# Altium PCB ADCS_Sensor_Simulator2.PcbDoc
Units mm, origin at the board's own origin, x right, y up, seen from the top; angles counter-clockwise.
Board outline 44.83 x 79.25 mm, 2 copper layers (Top Layer, Bottom Layer); 45 components, 36 nets, 211 pads, 55 vias.
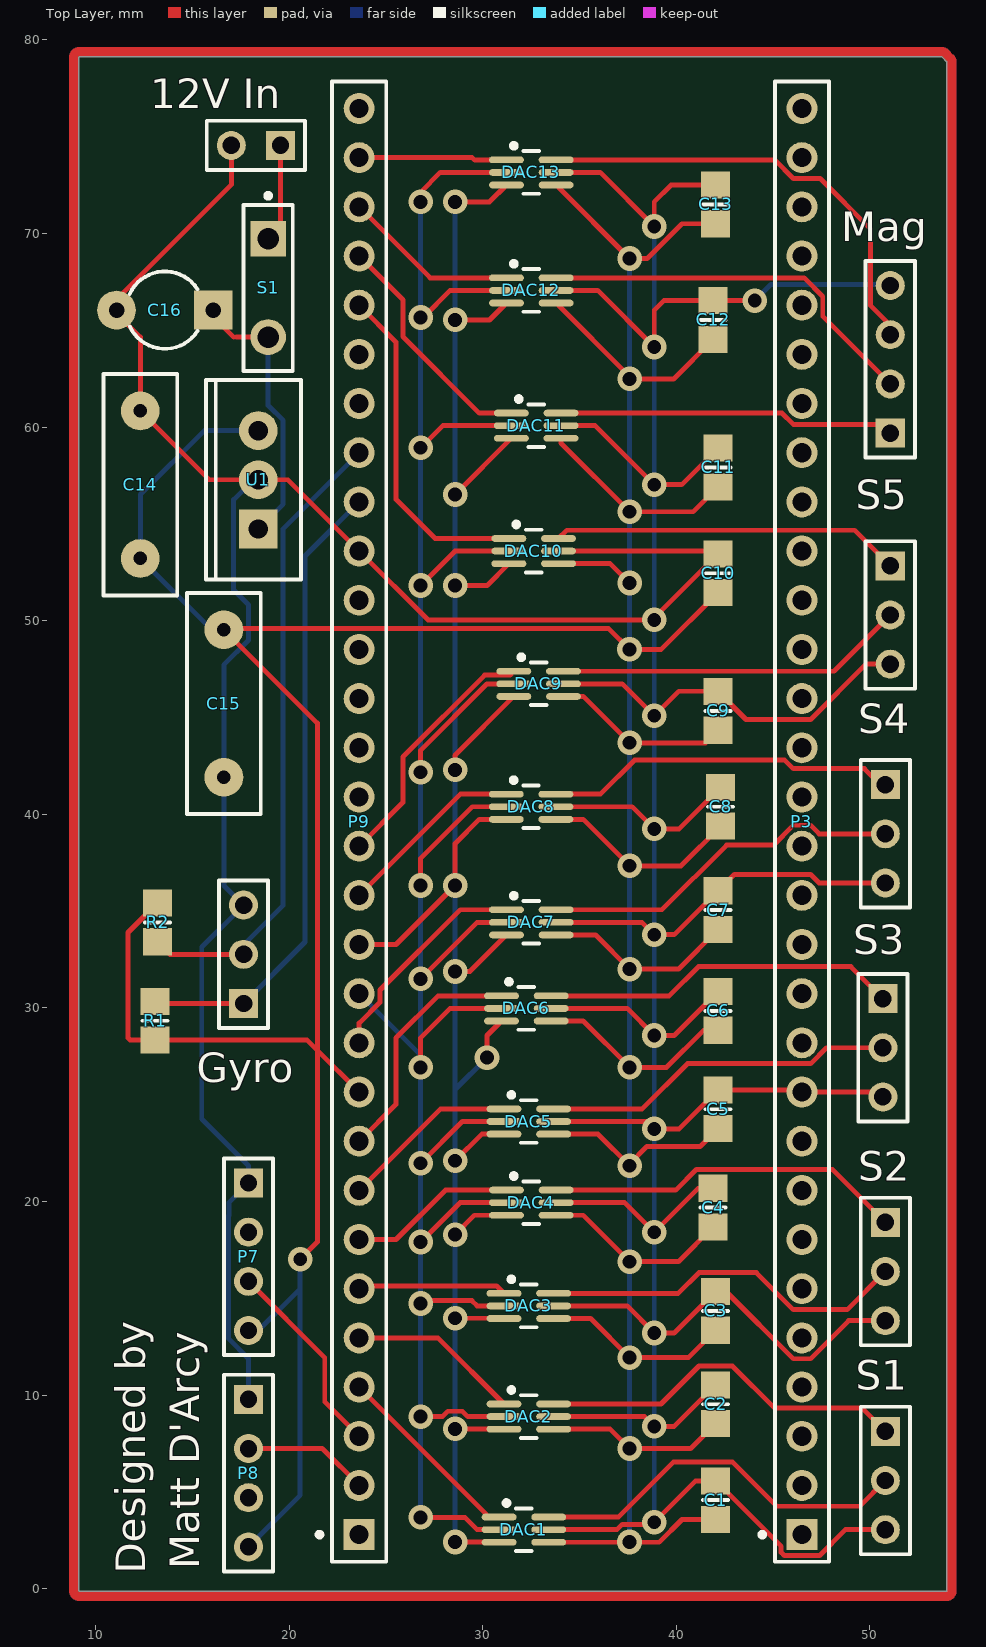
[diagram p0: Top Layer view]
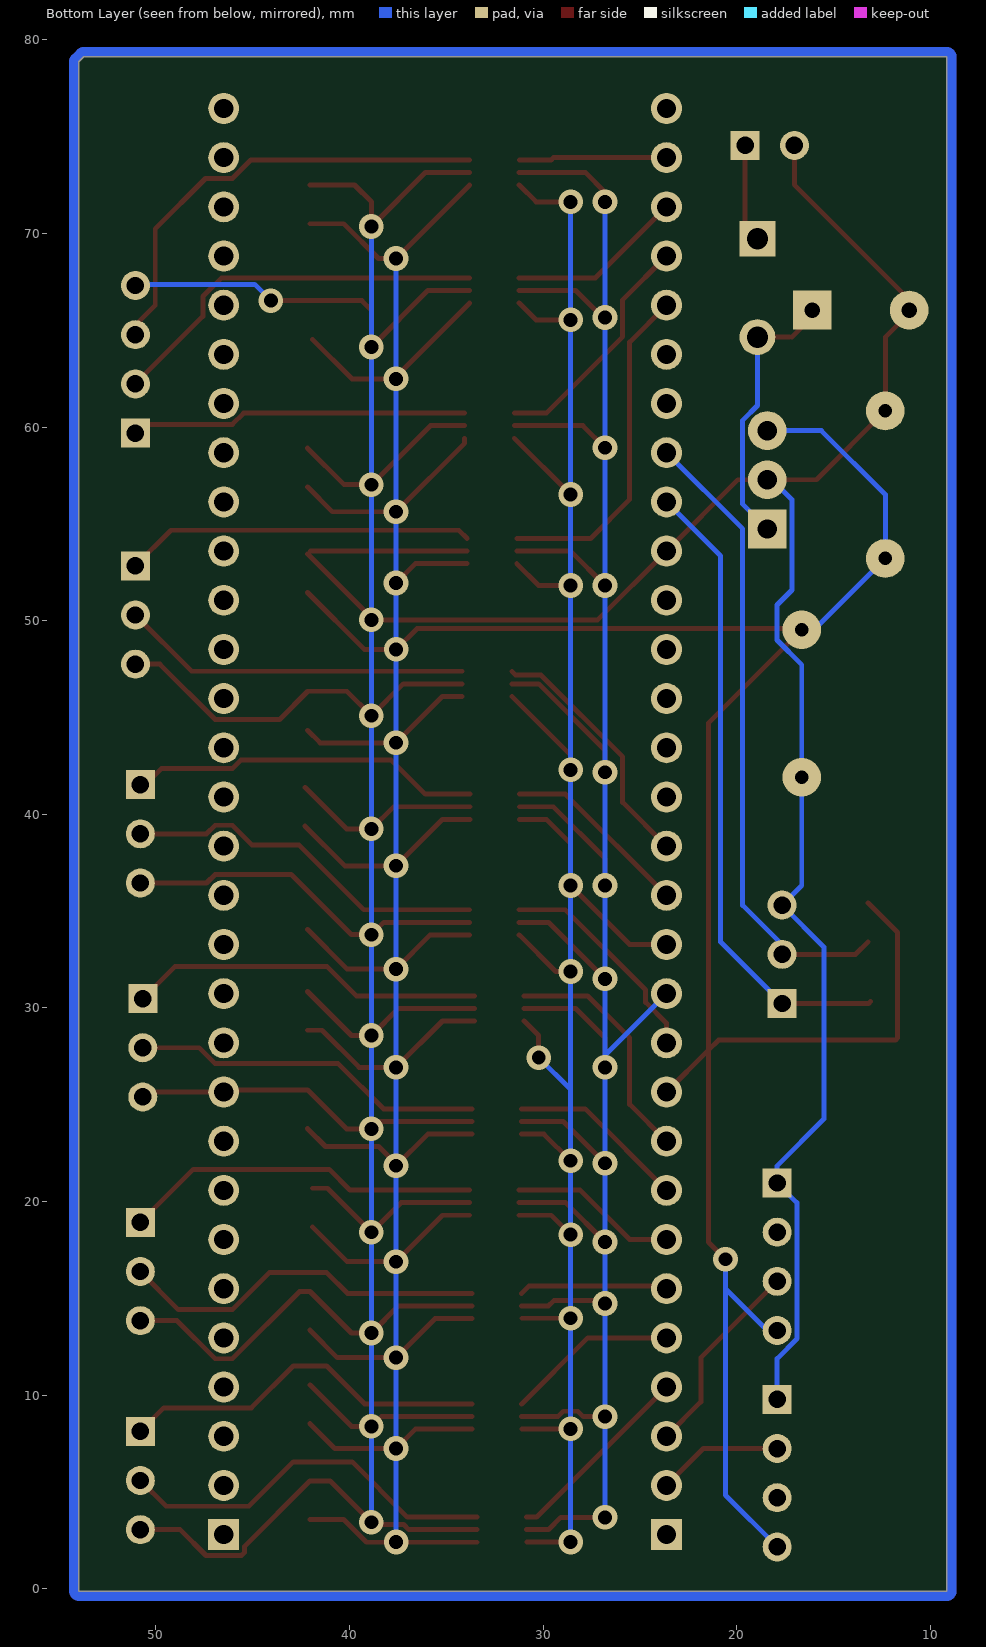
[diagram p1: Bottom Layer view, seen from below]

## Layer stack, top to bottom
Top Layer: signal copper 0.0356
Dielectric: dielectric 0.32, FR-4, Dk 4.8
Bottom Layer: signal copper 0.0356

## Board outline
9.144,78.994 9.144,-0.127 53.975,-0.127 53.975,78.867 53.721,79.121 9.144,79.121

## Design rules (kind name [scope] priority, off if disabled: settings)
Clearance [All] p1: gap=0.15
PolygonConnect [All] p1: connectstyle=Relief reliefconductorwidth=0.254 reliefentries=4 polygonreliefangle="90 Angle" airgapwidth=0.254
RoutingVias [All] p1: holewidth=0.711 width=1.27 viastyle="Through Hole" minholewidth=0.711 minwidth=1.27 maxholewidth=0.711 maxwidth=1.27
SolderMaskExpansion [All] p1: expansion=0.102
Width [All] p1: maxlimit=0.254 minlimit=0.254 preferedwidth=0.254
28 further rules are at their usual default settings.

## Components (designator, comment, footprint, x,y, rotation, side; value= is the part's Value field where it differs from the comment)
"12V In" "12V In" HDR1X2 19.558,74.549 r180 top (schematic designator P12)
C1 "Regulator" 6-0805_M 42.037,4.572 r90 top
C2 "Regulator" 6-0805_M 42.037,9.525 r90 top
C3 "Regulator" 6-0805_M 42.037,14.351 r90 top
C4 "Regulator" 6-0805_M 41.91,19.685 r90 top
C5 "Regulator" 6-0805_M 42.164,24.765 r90 top
C6 "Regulator" 6-0805_M 42.164,29.845 r90 top
C7 "Regulator" 6-0805_M 42.164,35.052 r90 top
C8 "Regulator" 6-0805_M 42.291,40.386 r90 top
C9 "Regulator" 6-0805_M 42.164,45.339 r90 top
C10 "Regulator" 6-0805_M 42.164,52.451 r90 top
C11 "Regulator" 6-0805_M 42.164,57.912 r90 top
C12 "Regulator" 6-0805_M 41.91,65.532 r90 top
C13 "Regulator" 6-0805_M 42.037,71.501 r90 top
C14 "Regulator" RAD-0.3 12.319,57.023 r90 top
C15 "Regulator" RAD-0.3 16.637,45.72 r270 top
C16 "Bypass" CAPR5-4X5 13.589,66.04 r180 top
DAC1 "LTC2630" LTC2630 32.131,3.048 r0 top
DAC2 "LTC2630" LTC2630 32.385,8.89 r0 top
DAC3 "LTC2630" LTC2630 32.385,14.605 r0 top
DAC4 "LTC2630" LTC2630 32.512,19.939 r0 top
DAC5 "LTC2630" LTC2630 32.385,24.13 r0 top
DAC6 "LTC2630" LTC2630 32.258,29.972 r0 top
DAC7 "LTC2630" LTC2630 32.512,34.417 r0 top
DAC8 "LTC2630" LTC2630 32.501,40.386 r0 top
DAC9 "LTC2630" LTC2630 32.893,46.736 r0 top
DAC10 "LTC2630" LTC2630 32.639,53.594 r0 top
DAC11 "LTC2630" LTC2630 32.766,60.071 r0 top
DAC12 "LTC2630" LTC2630 32.512,67.056 r0 top
DAC13 "LTC2630" LTC2630 32.512,73.152 r0 top
Gyro "Gyro I2C" HDR1X3 17.653,30.226 r90 top (schematic designator P11)
Mag "Mag" HDR1X4 51.054,59.69 r90 top (schematic designator P10)
P3 "ATMEGA128-RIGHT" HDR1X30 46.492,2.794 r90 top
P7 "Serial-ToPC" HDR1X4 17.907,20.955 r270 top
P8 "Serial-FromPC" HDR1X4 17.907,9.779 r270 top
P9 "ATMEGA128-LEFT" HDR1X30 23.622,2.794 r90 top
R1 "SCL Pullup" 6-0805_M 13.081,29.337 r90 top
R2 "SDA Pullup" 6-0805_M 13.208,34.417 r270 top
S1 "Sun1" HDR1X3 50.8,8.128 r270 top (schematic designator P1)
S1 "ON/OFF" SPST-2 18.923,67.183 r270 top
S2 "Sun2" HDR1X3 50.8,18.923 r270 top (schematic designator P2)
S3 "Sun3" HDR1X3 50.673,30.48 r270 top (schematic designator P4)
S4 "Sun4" HDR1X3 50.8,41.529 r270 top (schematic designator P5)
S5 "Sun5" HDR1X3 51.054,52.832 r270 top (schematic designator P6)
U1 "MC7800" 221A-06 18.415,57.277 r90 top

## Footprints (in the part's own frame and the unit in brackets; to place one, negate y for a bottom-side part, rotate by r counter-clockwise, add the part's x,y. Pads: shape width x height; smd on the part's side, far side on the other; paste and mask are expansions set on the pad)
6-0805_M [mm] "Chip Resistor, Body 2.0x1.2mm, IPC Low Density"
  rect 1.4x1.5 smd: 1(-1,0) 2(1,0)
  silkscreen extent 0,-0.65 0,0.65, body extent -1.07,-0.7 1.07,0.7, height 0.7
221A-06 [mm] "TO, Thru-Hole, Vertical, Heatsink Mounted; 3 In-Line Leads; Pitch 2.54 mm"
  rect 2x2 hole 1: 1(-2.54,0)
  round 2 hole 1: 2(0,0) 3(2.54,0)
  silkscreen extent -5.15,-2.2 5.15,2.7
CAPR5-4X5 [mm] "Capacitor; 2 Leads"
  rect 2x2 hole 0.8: 1(-2.5,0)
  round 2 hole 0.8: 2(2.5,0)
  silkscreen extent -1.69,-2 1.82,2
HDR1X2 [mm] "Connector; Header; 2 Position"
  rect 1.5x1.5 hole 0.9: 1(0,0)
  round 1.5 hole 0.9: 2(2.54,0)
  silkscreen extent -1.27,-1.27 3.81,1.27
HDR1X3 [mm] "Connector; Header; 3 Position"
  rect 1.5x1.5 hole 0.9: 1(0,0)
  round 1.5 hole 0.9: 2(2.54,0) 3(5.08,0)
  silkscreen extent -1.27,-1.27 6.35,1.27
HDR1X4 [mm] "Connector; Header; 4 Position"
  rect 1.5x1.5 hole 0.9: 1(0,0)
  round 1.5 hole 0.9: 2(2.54,0) 3(5.08,0) 4(7.62,0)
  silkscreen extent -1.27,-1.27 8.89,1.27
HDR1X30 [mm] "Connector; Header; 30 Position"
  rect 1.6x1.6 hole 0.99: 1(0,0)
  round 1.6 hole 0.99: 2(2.54,0) 3(5.08,0) 4(7.62,0) 5(10.16,0) 6(12.7,0) 7(15.24,0) 8(17.78,0) 9(20.32,0) 10(22.86,0) 11(25.4,0) 12(27.94,0) 13(30.48,0) 14(33.02,0) 15(35.56,0) 16(38.1,0) 17(40.64,0) 18(43.18,0) 19(45.72,0) 20(48.26,0) 21(50.8,0) 22(53.34,0) 23(55.88,0) 24(58.42,0) 25(60.96,0) 26(63.5,0) 27(66.04,0) 28(68.58,0) 29(71.12,0) 30(73.66,0)
  silkscreen extent -1.4,-1.4 75.06,2.17
LTC2630 [mm] "TSOP, 6-Leads, Body 2.00x1.25mm, Pitch 0.65mm, IPC Low Density"
  oval 1.8x0.35 smd: 1(-1.281,0.65) 2(-1.281,0) 3(-1.281,-0.65) 4(1.281,-0.65) 5(1.281,0) 6(1.281,0.65)
  silkscreen extent -1.02,-1.1 0.4,1.5, body extent -0.7,-1.1 0.7,1.1, height 1
RAD-0.3 [mm] "Radial Cap, Thru-Hole; 2 Leads; 0.3 in Pin Spacing"
  round 2 hole 0.7: 1(-3.81,0) 2(3.81,0)
  silkscreen extent -5.71,-1.91 5.71,1.91
SPST-2 [mm] "Switch; 2 Leads"
  rect 1.85x1.85 hole 1.1: 1(-2.54,0)
  round 1.85 hole 1.1: 2(2.54,0)
  silkscreen extent -4.89,-1.27 4.28,1.27

## Part data
"12V In": library part "Header 2", "Header, 2-Pin"
C1 C2 C3 C4 C5 C6 C7 C8 C9 C10 C11 C12 C13 C14 C15: library part Cap, "Capacitor"
C16: library part Cap2, "Capacitor"
Gyro S1 S2 S3 S4 S5: library part "Header 3", "Header, 3-Pin"
Mag P7 P8: library part "Header 4", "Header, 4-Pin"
P3 P9: library part "Header 30", "Header, 30-Pin"
R1 R2: library part Res2, "Resistor"
S1: library part SW-PB, "Switch"
U1: library part MC7805ACT, "Three-Terminal Positive Voltage Regulator"

## Via types
v1: diameter 1.27, hole 0.711, Top Layer to Bottom Layer, 55 vias

## Nets (pads, with @x,y where several pads share a name; then routed paths per layer and width w, separated by ;. In a path a pad name is that pad's centre, name@x,y a point inside that pad or via, vN(x,y) a via of type N, cw(c..) or ccw(c..) an arc to the next point about the centre after c; other vN are vias at no path point)
AZ1: DAC2.6 S1.1@50.8,8.128 | length 19.3
  Top Layer w0.254: DAC2.6 39.21,9.54 41.172,11.502 42.902,11.502 45.067,9.337 49.591,9.337 S1.1@50.8,8.128
AZ2: DAC4.6 S2.1 | length 18.6
  Top Layer w0.254: DAC4.6 39.972,20.589 41.045,21.662 48.061,21.662 S2.1
AZ3: DAC6.6 S3.1 | length 18.4
  Top Layer w0.254: DAC6.6 39.639,30.622 41.148,32.131 49.022,32.131 S3.1
AZ4: DAC8.6 S4.1 | length 18.3
  Top Layer w0.254: DAC8.6 36.083,41.036 37.846,42.799 45.604,42.799 46.046,42.357 49.718,42.357 50.546,41.529 S4.1
AZ5: DAC10.6 S5.1 | length 18.1
  Top Layer w0.254: DAC10.6 34.347,54.671 49.215,54.671 S5.1
EL1: DAC1.6 S1.2@50.8,5.588 | length 20.1
  Top Layer w0.254: DAC1.6 37.011,3.698 39.862,6.549 42.902,6.549 45.194,4.257 49.469,4.257 S1.2@50.8,5.588
EL2: DAC3.6 S2.2 | length 19.2
  Top Layer w0.254: DAC3.6 40.099,15.255 41.172,16.328 44.135,16.328 46.046,14.417 48.834,14.417 S2.2
EL3: DAC5.6 S3.2 | length 18.3
  Top Layer w0.254: DAC5.6 38.242,24.78 40.579,27.117 46.938,27.117 47.761,27.94 S3.2
EL4: DAC7.6 S4.2 | length 19
  Top Layer w0.254: DAC7.6 39.258,35.067 42.6,38.409 45.024,38.409 46.046,39.431 46.938,39.431 47.38,38.989 S4.2
EL5: DAC9.6 S5.2 | length 18.1
  Top Layer w0.254: DAC9.6 48.148,47.386 S5.2
GND: "12V In.2" C1.2 C2.2 C3.2 C4.2 C5.2 C6.2 C7.2 C8.2 C9.2 C10.2 C11.2 C12.2 C13.2 C14.2 C15.2 C16.2 DAC1.5 DAC2.5 DAC3.5 DAC4.5 DAC5.5 DAC6.5 DAC7.5 DAC8.5 DAC9.5 DAC10.5 DAC11.5 DAC12.5 DAC13.5 Gyro.3 Mag.4 P3.10 P7.1 P8.1 P9.21 S1.3 S2.3 S3.3 S4.3 S5.3 U1.2 | length 359.6
  Top Layer w0.254: C16.2@10.541,66.04 17.018,72.517 17.018,74.549 ; C16.2@10.922,66.04 12.319,64.643 C14.2 15.875,57.277 U1.2 19.939,57.277 P9.21 27.178,50.038 v1(38.862,50.038) 38.862,50.149 C10.2 ; DAC1.5 36.932,3.048 37.209,3.325 38.758,3.325 v1(38.862,3.429) 41.005,5.572 C1.2 45.415,2.194 45.415,1.879 45.577,1.717 47.407,1.717 48.738,3.048 S1.3 ; DAC6.5 37.465,29.972 v1(38.862,28.575) 39.894,28.575 C6.2 ; DAC2.5 38.354,8.89 v1(38.862,8.382) 39.894,8.382 C2.2 ; DAC3.5 37.465,14.605 v1(38.862,13.208) 39.894,13.208 C3.2 42.572,15.351 46.046,11.877 46.938,11.877 48.904,13.843 S2.3 ; DAC5.5 38.481,24.13 v1(38.862,23.749) 40.148,23.749 C5.2 46.381,25.765 P3.10 50.419,25.654 S3.3 ; DAC8.5 37.719,40.386 v1(38.862,39.243) 40.148,39.243 C8.2 ; DAC4.5 37.338,19.939 v1(38.862,18.415) 41.132,20.685 C4.2 ; DAC7.5 38.227,34.417 v1(38.862,33.782) 39.894,33.782 C7.2 43.003,36.891 46.938,36.891 47.38,36.449 S4.3 ; DAC12.5 35.941,67.056 v1(38.862,64.135) 38.862,66.04 39.354,66.532 C12.2 v1(44.053,66.532) ; DAC13.5 36.068,73.152 v1(38.862,70.358) 38.862,71.628 39.735,72.501 C13.2 ; DAC10.5 C10.2@42.021,53.594 ; DAC11.5 35.814,60.071 v1(38.862,57.023) 40.275,57.023 C11.2 ; DAC9.5 37.211,46.736 v1(38.862,45.085) 40.132,46.355 42.148,46.355 C9.2 43.606,44.897 46.938,44.897 49.793,47.752 S5.3
  Bottom Layer w0.254: P8.1 17.907,11.883 16.88,12.91 16.88,19.268 16.891,19.279 16.891,19.939 P7.1 17.907,21.844 15.494,24.257 15.494,33.147 Gyro.3 16.637,36.322 C15.2 16.637,47.724 17.914,49.001 17.914,50.807 17.138,51.583 17.138,56.254 18.161,57.277 U1.2 ; v1(38.862,3.429) v1(38.862,8.382) v1(38.862,13.208) v1(38.862,18.415) v1(38.862,23.749) v1(38.862,28.575) v1(38.862,33.782) v1(38.862,39.243) v1(38.862,45.085) v1(38.862,50.038) v1(38.862,57.023) v1(38.862,64.135) v1@38.862,70.231 ; v1(44.053,66.532) 44.892,67.371 50.993,67.371 Mag.4
MAGX: DAC11.6 Mag.1 | length 17.4
  Top Layer w0.254: DAC11.6 45.462,60.721 46.046,60.137 50.607,60.137 Mag.1
MAGY: DAC12.6 Mag.2 | length 20.1
  Top Layer w0.254: DAC12.6 46.603,67.706 47.569,66.74 47.569,65.715 Mag.2
MAGZ: DAC13.6 Mag.3 | length 23.6
  Top Layer w0.254: DAC13.6 45.081,73.802 46.046,72.837 47.432,72.837 50.027,70.242 50.027,66.283 51.054,65.256 Mag.3
NetC16_1: C16.1 S1.2@18.923,64.643 U1.1 | length 14.4
  Top Layer w0.254: C16.1@15.748,66.04 17.145,64.643 ; 17.272,64.643 S1.2@18.923,64.643
  Bottom Layer w0.254: U1.1 19.692,56.014 19.692,60.346 18.923,61.115 S1.2@18.923,64.643
NetP7_3: P7.3 P9.3 | length 10.4
  Top Layer w0.254: P7.3 21.844,11.938 21.844,9.652 P9.3
NetP8_2: P8.2 P9.2 | length 6.5
  Top Layer w0.254: P8.2 21.717,7.239 P9.2
PB0: DAC7.1 P9.11 | length 11.4
  Top Layer w0.254: P9.11 23.622,29.211 24.699,30.288 24.699,30.922 28.844,35.067 DAC7.1
PB3: DAC8.1 P9.14 | length 9.8
  Top Layer w0.254: P9.14 28.844,41.036 DAC8.1
PB4: DAC9.1 P9.15 | length 13.1
  Top Layer w0.254: P9.15 25.885,40.617 25.885,42.966 30.107,47.188 31.414,47.188 DAC9.1
PD4: DAC10.1 P9.26 | length 17.5
  Top Layer w0.254: P9.26 25.527,64.389 25.527,56.261 27.544,54.244 DAC10.1
PD5: DAC11.1 P9.27 | length 12.3
  Top Layer w0.254: P9.27 25.885,66.571 25.885,64.666 29.83,60.721 DAC11.1
PD6: DAC12.1 P9.28 | length 9.1
  Top Layer w0.254: P9.28 27.29,67.706 DAC12.1
PD7: DAC13.1 P9.29 | length 7.6
  Top Layer w0.254: P9.29 29.464,73.914 29.591,73.787 DAC13.1@31.216,73.787
PE2: DAC1.1 P9.4 | length 10
  Top Layer w0.254: P9.4 30.338,3.698 DAC1.1
PE3: DAC2.1 P9.5 | length 8.9
  Top Layer w0.254: P9.5 27.69,12.954 DAC2.1
PE4: DAC3.1 P9.6 | length 7.7
  Top Layer w0.254: P9.6 23.772,15.644 30.715,15.644 DAC3.1
PE5: DAC4.1 P9.7 | length 8.7
  Top Layer w0.254: P9.7 25.527,18.034 28.082,20.589 DAC4.1
PE6: DAC5.1 P9.8 | length 9.2
  Top Layer w0.254: P9.8 27.828,24.78 DAC5.1
PE7: DAC6.1 P9.9 | length 12.5
  Top Layer w0.254: P9.9 25.527,25.019 25.527,28.448 27.701,30.622 DAC6.1
POWER: "12V In.1" S1.1@18.923,69.723 | length 5.1
  Top Layer w0.254: S1.1@18.923,69.723 19.558,70.358 19.558,74.549
"SPI - MOSI": DAC1.3 DAC2.3 DAC3.3 DAC4.3 DAC5.3 DAC6.3 DAC7.3 DAC8.3 DAC9.3 DAC10.3 DAC11.3 DAC12.3 DAC13.3 P9.13 | length 120.6
  Top Layer w0.254: P9.13 25.527,33.274 v1(28.575,36.322) 28.575,38.481 29.83,39.736 DAC8.3 ; v1(28.575,2.413) DAC1.3@30.835,2.413 ; v1(28.575,8.255) DAC2.3@31.089,8.255 ; v1(28.575,13.97) DAC3.3@31.089,13.97 ; v1(28.575,18.288) 29.576,19.289 DAC4.3 ; v1(28.575,22.098) 29.957,23.48 DAC5.3 ; v1(28.575,31.877) 29.341,31.877 DAC7.3 ; v1(28.575,42.291) 28.575,43.049 DAC9.3 ; v1(28.575,51.816) 30.23,51.816 DAC10.3 ; v1(28.575,65.532) 30.357,65.532 DAC12.3 ; v1(28.575,71.628) 30.357,71.628 DAC13.3 ; v1@28.577,56.513 DAC11.3 ; v1(30.226,27.432) 30.226,28.573 ; 30.228,28.573 DAC6.3
  Bottom Layer w0.254: v1@28.575,2.286 v1(28.575,2.413) v1(28.575,8.255) v1(28.575,13.97) v1(28.575,18.288) v1(28.575,22.098) 28.575,25.781 ; v1@28.575,71.501 v1(28.575,65.532) v1(28.575,56.515) v1(28.575,51.816) v1(28.575,42.291) v1(28.575,36.322) v1(28.575,31.877) 28.575,25.781 ; v1(30.226,27.432) 28.575,25.781
"SPI - SCK": DAC1.2 DAC2.2 DAC3.2 DAC4.2 DAC5.2 DAC6.2 DAC7.2 DAC8.2 DAC9.2 DAC10.2 DAC11.2 DAC12.2 DAC13.2 P9.12 | length 143.4
  Top Layer w0.254: v1(26.797,3.683) 29.083,3.683 29.718,3.048 DAC1.2 ; v1(26.797,8.89) 27.92,8.89 28.197,9.167 28.953,9.167 29.23,8.89 DAC2.2 ; v1(26.797,14.732) 26.947,14.882 29.441,14.882 29.718,14.605 DAC3.2 ; v1(26.797,17.907) 28.829,19.939 DAC4.2 ; v1(26.797,21.971) 28.956,24.13 DAC5.2 ; v1(26.797,26.924) 26.797,28.448 28.321,29.972 DAC6.2 ; v1(26.797,31.496) 29.718,34.417 DAC7.2 ; v1(26.797,36.322) 26.797,37.719 29.464,40.386 DAC8.2 ; v1(26.797,42.164) 26.797,43.307 30.226,46.736 DAC9.2 ; v1(26.797,51.816) 28.575,53.594 DAC10.2 ; v1(26.797,58.928) 27.94,60.071 DAC11.2 ; v1(26.797,65.659) 26.924,65.659 28.321,67.056 DAC12.2 ; v1(26.797,71.628) 26.797,72.136 27.813,73.152 DAC13.2
  Bottom Layer w0.254: P9.12 26.797,27.559 ; v1(26.797,3.683) v1(26.797,8.89) v1(26.797,14.732) v1(26.797,17.907) v1(26.797,21.971) v1(26.797,26.924) 26.797,27.559 ; v1(26.797,71.628) v1(26.797,65.659) v1(26.797,58.928) v1(26.797,51.816) v1(26.797,42.164) v1(26.797,36.322) v1(26.797,31.496) 26.797,27.559
"TWI - SCL": Gyro.1 P9.22 R1.2 | length 33
  Top Layer w0.254: R1.2 13.192,30.226 Gyro.1
  Bottom Layer w0.254: Gyro.1 20.828,33.401 20.828,53.34 P9.22
"TWI - SDA": Gyro.2 P9.23 R2.2 | length 33.1
  Top Layer w0.254: R2.2 13.859,32.766 Gyro.2
  Bottom Layer w0.254: Gyro.2 17.653,33.252 19.692,35.291 19.692,54.744 P9.23
VCC: C1.1 C2.1 C3.1 C4.1 C5.1 C6.1 C7.1 C8.1 C9.1 C10.1 C11.1 C12.1 C13.1 C14.1 C15.1 DAC1.4 DAC2.4 DAC3.4 DAC4.4 DAC5.4 DAC6.4 DAC7.4 DAC8.4 DAC9.4 DAC10.4 DAC11.4 DAC12.4 DAC13.4 P7.4 P8.4 P9.10 R1.1 R2.1 U1.3 | length 307.7
  Top Layer w0.254: R2.1 11.684,33.893 11.684,28.448 11.795,28.337 R1.1 20.939,28.337 21.463,27.813 ; v1(20.574,17.018) 21.463,17.907 21.463,27.813 ; P9.10 21.463,27.813 ; DAC1.4 39.121,2.398 40.295,3.572 C1.1 ; DAC6.4 35.194,29.322 v1(37.592,26.924) 39.497,26.924 41.418,28.845 C6.1 ; DAC2.4 36.591,8.24 v1(37.592,7.239) 40.751,7.239 C2.1 ; DAC3.4 35.575,13.955 v1(37.592,11.938) 40.624,11.938 C3.1 ; DAC5.4 35.956,23.48 v1(37.592,21.844) ; DAC8.4 35.194,39.736 v1(37.592,37.338) 40.243,37.338 C8.1 ; DAC4.4 35.194,19.289 v1(37.592,16.891) 40.116,16.891 C4.1 ; DAC7.4 35.829,33.767 v1(37.592,32.004) 40.116,32.004 C7.1 ; DAC12.4 37.592,62.607 v1(37.592,62.484) 39.862,62.484 C12.1 ; DAC13.4 37.588,68.707 v1(37.592,68.707) 38.501,68.707 40.295,70.501 C13.1 ; DAC10.4 36.591,52.944 v1(37.592,51.943) ; DAC11.4 34.047,59.171 v1(37.592,55.626) 40.878,55.626 C11.1 ; DAC9.4 35.194,46.086 v1(37.592,43.688) 41.513,43.688 C9.1 ; v1@37.592,21.945 38.484,22.837 41.236,22.837 C5.1 ; C10.1 39.227,48.514 v1(37.587,48.514) 36.51,49.591 16.698,49.591 C15.1 21.463,44.704 21.463,27.813
  Bottom Layer w0.254: C15.1@16.002,49.53 C14.1 12.319,56.515 15.621,59.817 U1.3 ; P8.4 20.574,4.826 20.574,15.494 ; P7.4@18.415,13.335 20.574,15.494 ; v1(20.574,17.018) 20.574,15.494 ; v1(37.587,2.413) v1(37.587,48.514) v1@37.587,68.707
pads on no net: P3.1 P3.2 P3.3 P3.4 P3.5 P3.6 P3.7 P3.8 P3.9 P3.11 P3.12 P3.13 P3.14 P3.15 P3.16 P3.17 P3.18 P3.19 P3.20 P3.21 P3.22 P3.23 P3.24 P3.25 P3.26 P3.27 P3.28 P3.29 P3.30 P7.2 P8.3 P9.1 P9.16 P9.17 P9.18 P9.19 P9.20 P9.24 P9.25 P9.30

## Other copper
Multi-Layer:
  lines w0.5: 8.894,-0.127 ccw(c9.144,-0.127) 9.144,-0.377 ; 8.894,-0.127 ccw(c9.144,-0.127) 9.144,-0.377 ; 8.894,-0.127 8.894,78.994 8.894,79.121 ; 8.894,79.121 cw(c9.144,79.121) 9.144,79.371 ; 8.894,79.121 cw(c9.144,79.121) 9.144,79.371 ; 9.144,-0.377 53.975,-0.377 ; 9.144,79.371 53.721,79.371 ; 53.721,79.371 cw(c53.721,79.121) 53.898,79.298 ; 53.721,79.371 cw(c53.721,79.121) 53.898,79.298 ; 53.898,79.298 ccw(c53.721,79.121) 53.898,79.298 ; 53.898,79.298 53.898,79.298 ; 53.898,79.298 53.898,79.298 ; 53.898,79.298 54.152,79.044 ; 53.975,-0.377 ccw(c53.975,-0.127) 54.225,-0.127 ; 53.975,-0.377 ccw(c53.975,-0.127) 54.225,-0.127 ; 54.152,79.044 cw(c53.975,78.867) 54.225,78.867 ; 54.152,79.044 ccw(c53.975,78.867) 54.152,79.044 ; 54.152,79.044 cw(c53.975,78.867) 54.225,78.867 ; 54.152,79.044 54.152,79.044 ; 54.152,79.044 54.152,79.044 ; 54.225,-0.127 54.225,78.867

## Silkscreen, mask and mechanical layers (free items; w line width, h text height)
Top Overlay:
  text "Matt D'Arcy" at 15.367,1.016 h1.52 r90
  text "Designed by" at 12.573,0.762 h1.52 r90